# EAGLE board untitled (EAGLE 7.6.0)

Size 63 x 66 mm. Coordinates in mm from the lower left corner, seen from the top.
Outline: 0,0 63,0 63,28 56.5,28 56.5,38 63,38 63,66 0,66 0,38 8.5,38 8.5,28 0,28 0,0
Copper layers (1*16): Top 0.035mm / dielectric 1.5mm / Bottom 0.035mm
Design rules "default *": minimum track width 10mil, minimum drill 24mil, track to track 10mil, track to pad 10mil, pad to pad 10mil, via to via 10mil, smd to smd 10mil, copper to edge 40mil, drill to drill 8mil, minimum pad ring 10mil, minimum via ring 8mil, stop-mask expansion 4mil, vias tented up to drill 0mil, thermal gap 10mil

## Footprints (pad centres in the part's own frame; a part is rotated, then mirrored left to right if it is on the bottom)
OUT_HEAD_4_AC_2CH = drill 1.6 pad 2.54: 1 -7.14,0.22; 2 -2.06,0.22; 3 3.02,0.22; 4 8.1,0.22
2.54*4 = drill 1.016 pad 1.88: 1 -3.68,2.03; 2 -1.14,2.03; 3 1.4,2.03; 4 3.94,2.03
AC_DC_SIDE = drill 1.016 pad 1.88: 1 -7.67,15; 2 -12.75,15; 3 13.21,2.68; 4 18.29,2.68
2_SOLID_RELAY = drill 2 pad 3.81: 1 -6.23,-29.32; 2 -1.15,-29.32; 3 3.93,-29.32; 4 9.01,-29.32; 5 -7.53,15.38; 6 -2.45,15.38; 7 4.43,15.38; 8 9.51,15.38
315MHZ_RX_UART = drill 1.016 pad 1.88: 1 -2.87,-4.32; 2 -0.33,-4.32; 3 2.21,-4.32; 4 4.75,-4.32
ESP8266_MINI_SIDE = drill 1.016 pad 1.88: 1 -10.61,1.53; 2 -8.07,1.53; 3 -5.53,1.53; 4 -2.99,1.53; 5 -0.45,1.53; 6 2.09,1.53; 7 4.63,1.53; 8 7.17,1.53

## Placement (x,y rotation side)
J  [OUT_HEAD_4_AC_2CH]  26.5,5 180 top
J1  [2.54*4]  5.5,60 90 top
POWER  [AC_DC_SIDE]  56.6,15.1 90 top
RELAY  [2_SOLID_RELAY]  32.5,30 180 top
RX  [315MHZ_RX_UART]  7.5,16 90 top
U  [ESP8266_MINI_SIDE]  10.5,46 270 top

## Library data of the parts
J J1 POWER RELAY RX U = rx

## Nets
+5V: J1.4 POWER.3 RELAY.1 RX.4 U.1
D1: RX.3 U.6
D2: RELAY.3 U.5
D3: RELAY.4 U.4
D4: U.3
GND: J1.1 J1.2 J1.3 POWER.4 RELAY.2 RX.1 U.2
L: J.2 POWER.1 RELAY.5 RELAY.7
N: J.1 POWER.2
N$17: U.8
OUT1: J.3 RELAY.6
OUT2: J.4 RELAY.8
RX: U.7

## Tracks (layer width: path | path; a pad name or v marks a point on that pad's centre or on a via)
+5V  (4 unrouted)
D1  (1 unrouted)
D2  (1 unrouted)
D3  (1 unrouted)
GND  (6 unrouted)
L  (3 unrouted)
N  (1 unrouted)
OUT1  (1 unrouted)
OUT2  (1 unrouted)